# EAGLE board CorrectedBRD (EAGLE 7.6.0)
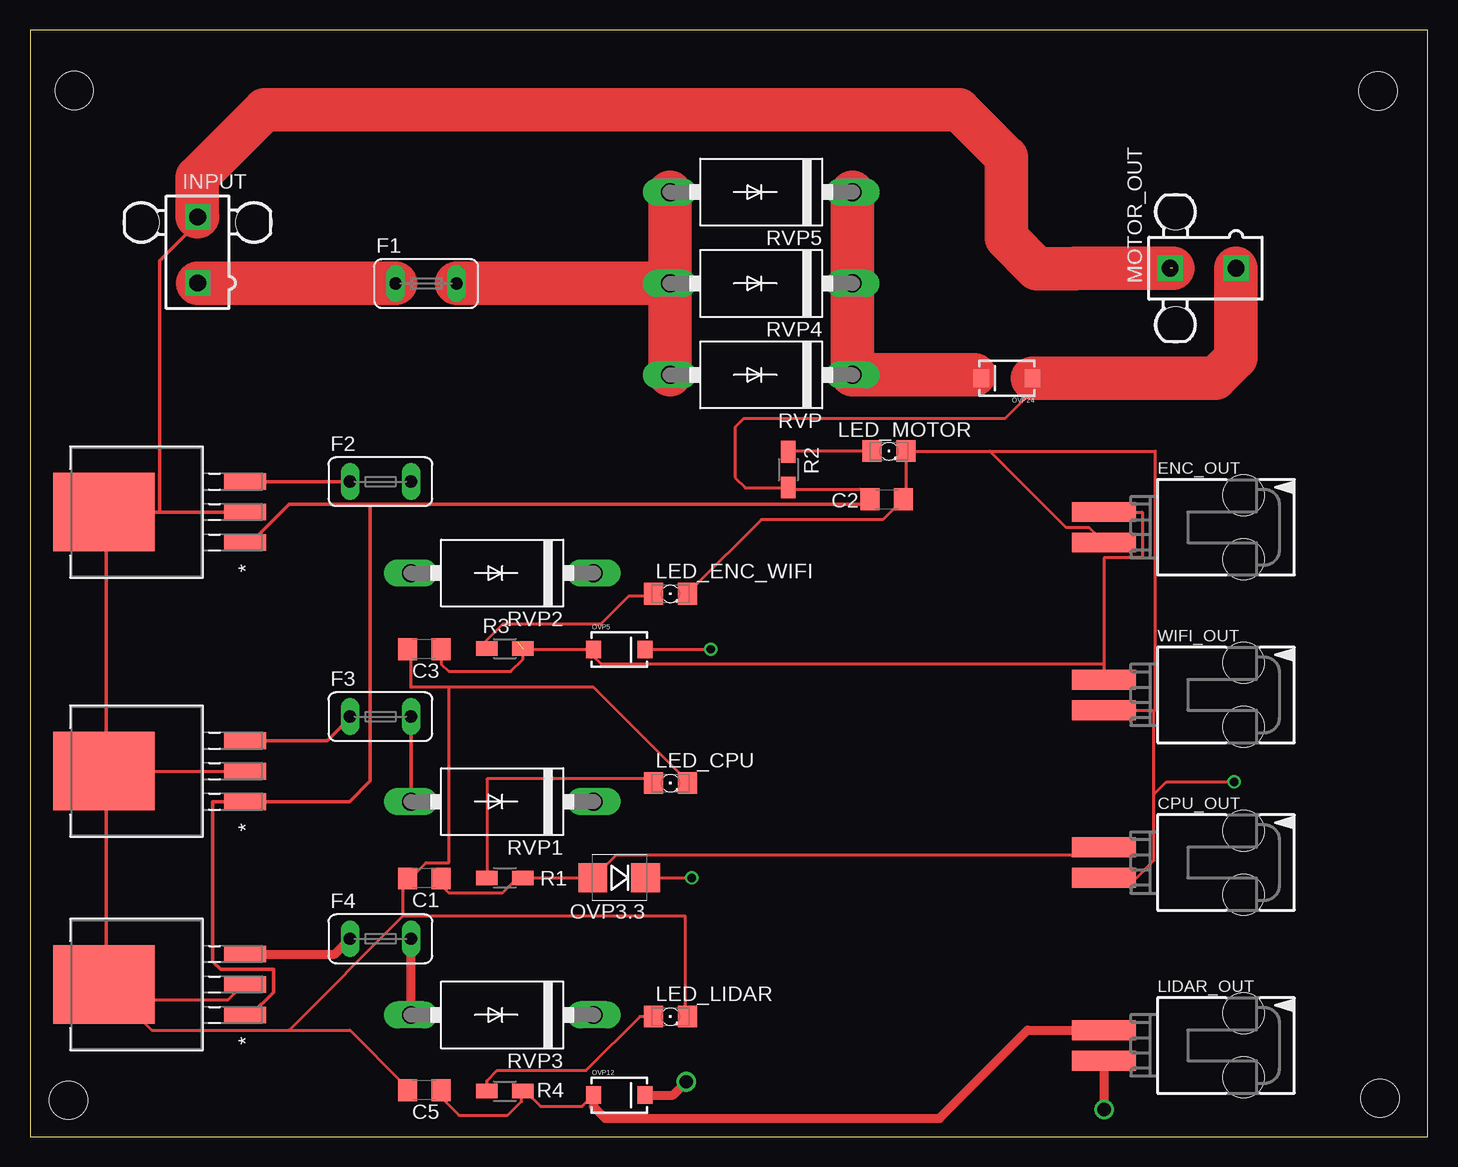
[diagram p0: board, top side]
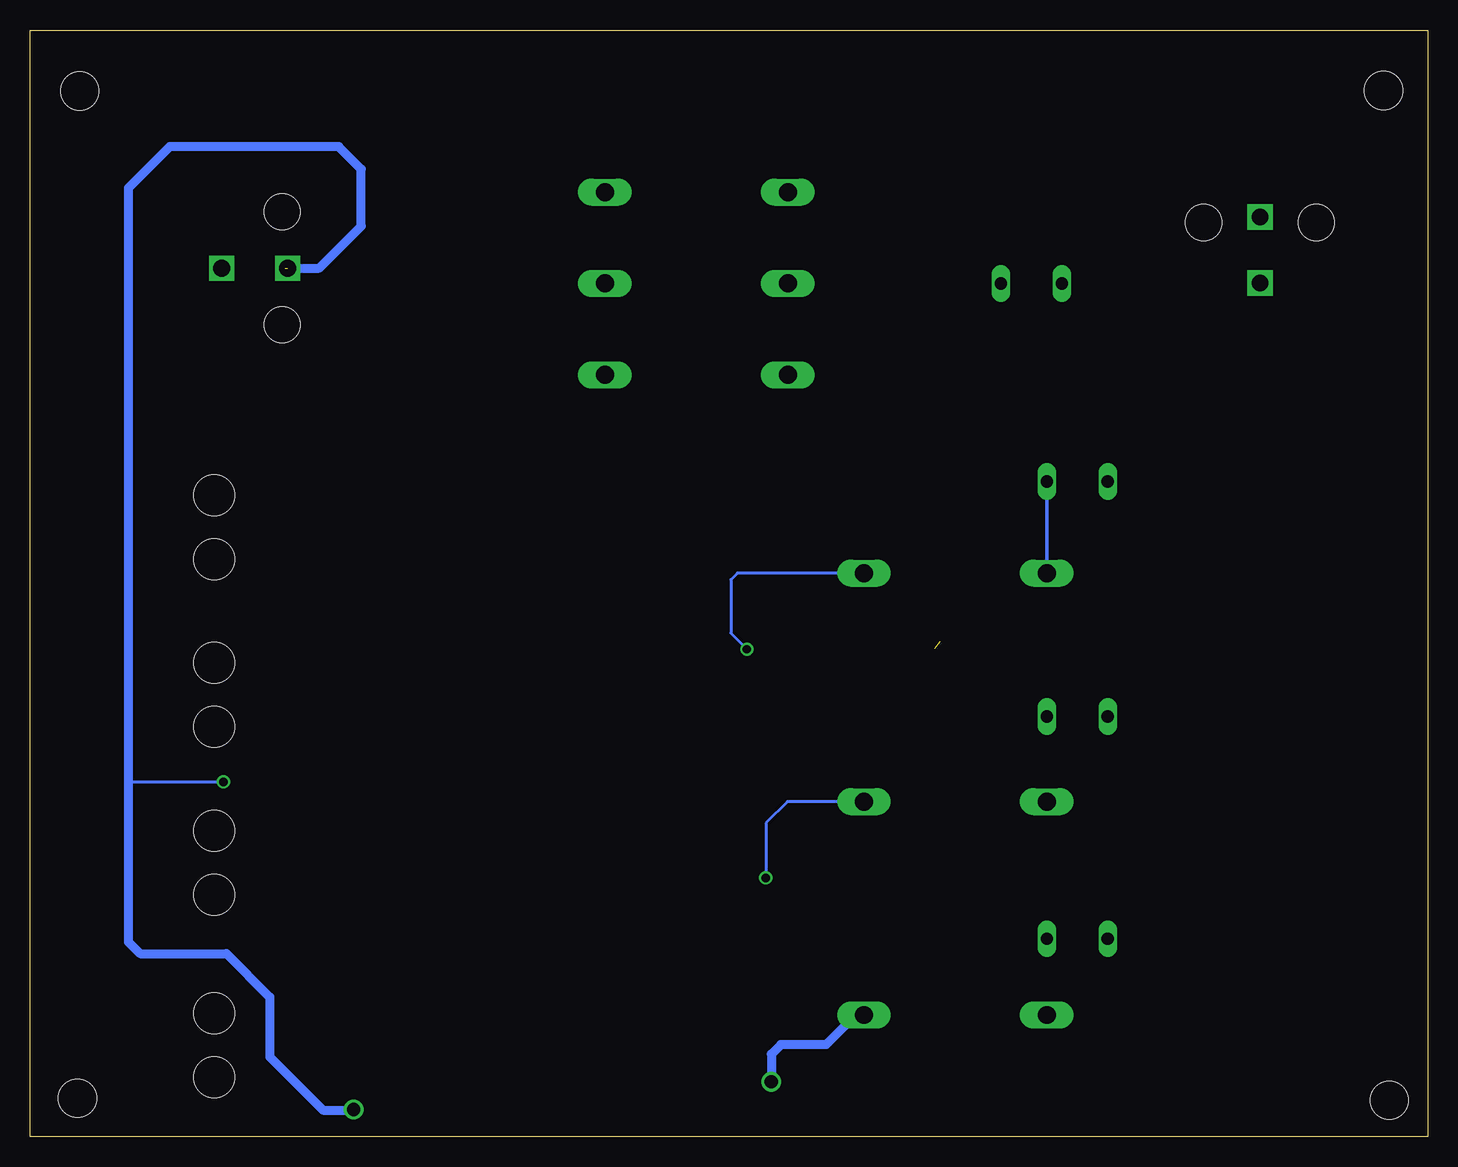
[diagram p1: board, bottom side, seen from below]

Size 116.51 x 92.24 mm. Coordinates in mm from the lower left corner, seen from the top.
Outline: 0,0 116.51,0 116.51,92.24 0,92.24 0,0
Copper layers (1*16): Top 0.035mm / dielectric 1.5mm / Bottom 0.035mm
Design rules "default": minimum track width 10mil, minimum drill 24mil, track to track 8mil, track to pad 8mil, pad to pad 8mil, via to via 8mil, smd to smd 8mil, copper to edge 40mil, drill to drill 8mil, minimum pad ring 10mil, minimum via ring 8mil, stop-mask expansion 4mil, vias tented up to drill 0mil, thermal gap 10mil
Holes 3.17 mm at 3.68,87.2 112.55,3.23 112.37,87.15 3.2,3.05

## Footprints (pad centres in the part's own frame; a part is rotated, then mirrored left to right if it is on the bottom)
C1206 = smd 1.6 x 1.8: 1 -1.4,0; 2 1.4,0
15-91-02 = smd 1.651 x 5.334: 1 -1.27,-10.795; 2 1.27,-10.795 | hole 3.404: -2.667,0.838; 2.667,0.838
TE5 = drill 1.016 long: 1 -2.54,0; 2 2.54,0
5566-2 = drill 1.4 square: 1 0,-2.75; 2 0,2.75 | hole 3: 4.7,2.29; -4.7,2.29
1206 = smd 1.6 x 1.803: A -1.422,0; C 1.422,0
SMB-DIODE = smd 2.4 x 2.4: A 2.2,0; C -2.2,0
SMA-DIODE = smd 1.27 x 1.47: A -2.15,0; C 2.15,0
R1206W = smd 1.8 x 1.2: 1 -1.499,0; 2 1.499,0
DO201-15 = drill 1.499 long: A 7.62,0; C -7.62,0
TO-263-3 = smd 1.397 x 3.505: 1 -2.54,-9.055; 2 0,-9.055; 3 2.54,-9.055 | smd 6.553 x 8.458: 4 0,2.743

## Placement (x,y rotation side)
C1  0.1UF  [C1206]  32.87,21.54 180 top
C2  0.1UF  [C1206]  71.42,53.14 0 top
C3  0.1UF  [C1206]  32.87,40.64 180 top
C5  0.1UF  [C1206]  32.87,3.89 180 top
CPU_OUT  C-GRID-02-15-19  [15-91-02]  100.33,22.86 270 top
ENC_OUT  C-GRID-02-15-19  [15-91-02]  100.33,50.8 270 top
F1  15A  [TE5]  33.02,71.12 0 top
F2  1A  [TE5]  29.21,54.61 0 top
F3  1A  [TE5]  29.21,35.03 0 top
F4  2A  [TE5]  29.21,16.51 0 top
INPUT  5566-2  [5566-2]  13.97,73.91 0 top
LED_CPU  RED  [1206]  53.39,29.49 0 top
LED_ENC_WIFI  RED  [1206]  53.39,45.26 0 top
LED_LIDAR  RED  [1206]  53.39,10.03 0 top
LED_MOTOR  RED  [1206]  71.6,57.15 0 top
LIDAR_OUT  C-GRID-02-15-19  [15-91-02]  100.33,7.62 270 top
MOTOR_OUT  5566-2  [5566-2]  97.79,72.39 90 top
OVP3.3  DIODE-ZENERSMB  [SMB-DIODE]  49.12,21.59 180 top
OVP5  TVSSMA  [SMA-DIODE]  49.12,40.61 0 top
OVP12  TVSSMA  [SMA-DIODE]  49.12,3.48 0 top
OVP24  TVSSMA  [SMA-DIODE]  81.43,63.22 180 top
R1  82OHM  [R1206W]  39.6,21.59 0 top
R2  1.1KOHM  [R1206W]  63.22,55.6 270 top
R3  180OHM  [R1206W]  39.6,40.69 0 top
R4  560OHM  [R1206W]  39.6,3.81 0 top
RVP  1N5400  [DO201-15]  60.96,63.5 180 top
RVP1  1N5400  [DO201-15]  39.37,27.94 180 top
RVP2  1N5400  [DO201-15]  39.37,46.99 180 top
RVP3  1N5400  [DO201-15]  39.37,10.16 180 top
RVP4  1N5400  [DO201-15]  60.96,71.12 180 top
RVP5  1N5400  [DO201-15]  60.96,78.74 180 top
U1  MIC29300-3.3WU  [TO-263-3]  8.89,30.48 90 top
U2  MIC29300-5.0WU  [TO-263-3]  8.89,52.07 90 top
U3  MIC29300-12WU  [TO-263-3]  8.89,12.7 90 top
WIFI_OUT  C-GRID-02-15-19  [15-91-02]  100.33,36.83 270 top

## Library data of the parts
C1-C3 C5 LED_CPU LED_ENC_WIFI LED_LIDAR LED_MOTOR = adafruit
CPU_OUT ENC_OUT LIDAR_OUT WIFI_OUT = con-molex; OC_FARNELL: unknown; OC_NEWARK: unknown
F1-F4 = fuse; OC_FARNELL: unknown; OC_NEWARK: unknown
INPUT MOTOR_OUT = con-molex; OC_FARNELL: 1822072; OC_NEWARK: unknown
OVP3.3 OVP5 OVP12 OVP24 = SparkFun-DiscreteSemi
R1-R4 = resistor
RVP RVP1-RVP5 = diode
U1 = MIC29300-5WU; COPYRIGHT: Copyright (C) 2015 Accelerated Designs. All rights reserved; MANUFACTURER_PART_NUMBER: mic29300-3.3wu; VENDOR: MICREL
U2 = MIC29300-5WU; COPYRIGHT: Copyright (C) 2015 Accelerated Designs. All rights reserved; MANUFACTURER_PART_NUMBER: mic29300-5.0wu; VENDOR: MICREL
U3 = MIC29300-5WU; COPYRIGHT: Copyright (C) 2015 Accelerated Designs. All rights reserved; MANUFACTURER_PART_NUMBER: mic29300-12wu; VENDOR: MICREL

## Nets
24V_P: C2.1 MOTOR_OUT.1 OVP24.A R2.2 U1.1 U2.1 U3.1
+3V3: C1.1 CPU_OUT.1 OVP3.3.A R1.2
+5V: C3.1 ENC_OUT.1 OVP5.A R3.2 WIFI_OUT.1
+12V: C5.1 LIDAR_OUT.1 OVP12.A R4.2
+24V: F1.1 INPUT.1
GND: C1.2 C2.2 C3.2 C5.2 CPU_OUT.2 ENC_OUT.2 INPUT.2 LED_CPU.C LED_ENC_WIFI.C LED_LIDAR.C LED_MOTOR.C LIDAR_OUT.2 MOTOR_OUT.2 U1.2 U1.4 U2.2 U2.4 U3.2 U3.4 WIFI_OUT.2
N$1: F1.2 RVP4.A RVP5.A RVP.A
N$2: OVP24.C RVP4.C RVP5.C RVP.C
N$3: F3.1 U1.3
N$4: F2.1 U2.3
N$5: F4.1 U3.3
N$6: F3.2 RVP1.A
N$7: F2.2 RVP2.A
N$8: F4.2 RVP3.A
N$9: OVP3.3.C RVP1.C
N$10: OVP5.C RVP2.C
N$11: OVP12.C RVP3.C
N$12: LED_CPU.A R1.1
N$14: LED_MOTOR.A R2.1
N$15: LED_ENC_WIFI.A R3.1
N$16: LED_LIDAR.A R4.1

## Tracks (layer width: path | path; a pad name or v marks a point on that pad's centre or on a via)
24V_P
  Top 0.254: 18.41,10.16 U3.1 | 18.41,49.53 U2.1 | 69.85,52.7 C2.1 69.85,53.34 69.22,53.98 63.5,53.98 R2.2 63.2,54.08 59.64,54.08 58.78,54.94 58.78,59.16 59.49,59.87 81.28,59.87 83.19,61.77 83.19,62.87 OVP24.A | 28.37,52.68 28.35,52.7
  Top 0.305: 18.41,10.16 20.32,12.06 20.32,13.97 15.88,13.97 15.24,14.61 15.24,27.94 U1.1 26.64,27.94 28.37,29.67 28.37,52.68 | 18.41,49.53 21.59,52.7 28.35,52.7 69.85,52.7
  Top 3.607: OVP24.A 98.81,63.22 100.51,64.92 100.51,72.36 MOTOR_OUT.1
+3V3
  Top 0.254: C1.1 34.29,20.95 34.92,20.32 39.37,20.32 40.64,21.59 R1.2 OVP3.3.A 46.99,21.59 48.9,23.5 88.9,23.5 CPU_OUT.1
+5V  (1 unrouted)
  Top 0.254: C3.1 34.29,40.64 34.29,39.4 34.9,38.79 40.08,38.79 41.1,39.8 R3.2 41.27,40.64 46.35,40.64 OVP5.A 46.99,40.01 47.62,39.37 89.53,39.37 | 89.53,39.37 89.53,48.26 92.71,48.26 92.71,52.07 ENC_OUT.1 | 89.53,39.37 WIFI_OUT.1
+12V
  Top 0.254: R4.2 41.27,3.81 42.55,2.54 46.03,2.54 OVP12.A | 40.64,3.81 R4.2 | C5.1 34.27,3.3 35.76,1.8 39.8,1.8 41,2.97 41,3.71 R4.2
  Top 0.762: OVP12.A 46.97,2.53 47.95,1.55 75.82,1.55 83.16,8.89 LIDAR_OUT.1
+24V
  Top 0.254: 13.97,71.12 INPUT.1
  Top 3.607: 13.97,71.12 F1.1
GND  (via drill 0.7, 1.1)  (1 unrouted)
  Top 0.254: LED_MOTOR.C 73.03,53.34 C2.2 72.39,52.7 71.12,51.44 60.96,51.44 55.24,45.72 LED_ENC_WIFI.C | LED_MOTOR.C 80.01,57.15 | 80.01,57.15 93.83,57.15 93.83,35.56 | LED_MOTOR.C | ENC_OUT.2 88.27,50.8 86.36,50.8 80.01,57.15 | 13.97,76.2 INPUT.2 | 34.92,37.47 46.99,37.47 54.61,29.84 LED_CPU.C | 34.92,37.47 31.75,37.47 31.75,40.64 C3.2 | U1.2 6.35,30.48 U1.4 | 21.59,8.89 10.16,8.89 7.62,11.43 | 21.59,8.89 26.67,8.89 31.11,4.45 C5.2 | 7.62,11.43 6.35,12.7 U3.4 7.62,11.43 | 31.11,18.41 31.11,20.95 C1.2 31.75,21.59 33.02,22.86 34.92,22.86 34.92,37.47 | 21.59,8.89 31.11,18.41 | 31.11,18.41 54.61,18.41 54.61,10.16 LED_LIDAR.C | 7.62,11.43 16.51,11.43 17.78,12.7 U3.2 | 6.35,52.07 U2.4 | WIFI_OUT.2 93.83,35.56 | CPU_OUT.2 92.25,21.59 93.7,23.04 93.7,28.55 | 93.7,28.55 93.7,35.43 93.83,35.56 | 93.7,28.55 94.74,29.59 v100.38,29.59
  Top 0.305: 10.79,52.07 6.35,52.07 6.35,30.48 6.35,12.7 | 10.79,52.07 U2.2 | 13.97,76.2 10.79,73.03 10.79,52.07
  Top 0.762: LIDAR_OUT.2 v89.53,2.29
  Top 3.607: 95.25,72.39 87.12,72.39 87.1,72.36 83.95,72.36 81.38,74.93 81.38,81.64 77.42,85.6 19.56,85.6 13.95,79.98 13.95,76.69 INPUT.2
  Bottom 0.254: 108.31,29.59 v100.38,29.59
  Bottom 0.762: MOTOR_OUT.2 92.41,72.39 88.9,75.89 88.9,80.64 90.78,82.53 104.85,82.53 108.31,79.07 108.31,29.59 108.31,16.26 107.31,15.27 100.13,15.27 96.52,11.66 96.52,6.68 92.08,2.23 89.59,2.23 v89.53,2.29
N$1
  Top 3.607: RVP4.A F1.2 | RVP4.A RVP.A | RVP4.A RVP5.A
N$2
  Top 0.254: 78.74,63.5 OVP24.C
  Top 3.607: RVP5.C RVP4.C RVP.C 78.74,63.5
N$3
  Top 0.305: U1.3 24.77,33.02 26.67,34.92 F3.1
N$4
  Top 0.305: U2.3 F2.1
N$5
  Top 0.762: F4.1 25.4,15.24 U3.3
N$6
  Top 0.305: RVP1.A F3.2
N$7
  Bottom 0.305: RVP2.A F2.2
N$8
  Top 0.762: RVP3.A F4.2
N$9  (via drill 0.7)
  Top 0.254: 50.8,21.59 OVP3.3.C v55.17,21.59
  Bottom 0.254: RVP1.C 53.37,27.94 55.14,26.16 55.14,21.61 v55.17,21.59
N$10  (via drill 0.7)
  Top 0.254: OVP5.C 51.44,40.64 v56.74,40.64
  Bottom 0.254: RVP2.C 57.53,46.99 58.09,46.43 58.09,41.99 v56.74,40.64
N$11  (via drill 1.1)
  Top 0.762: OVP12.C 53.59,3.48 v54.71,4.6
  Bottom 0.762: RVP3.C 47.68,10.16 50.14,7.7 53.92,7.7 54.71,6.91 v54.71,4.6
N$12
  Top 0.254: R1.1 38.1,29.84 51.44,29.84 LED_CPU.A | R1.1
N$14
  Top 0.254: LED_MOTOR.A 63.5,57.15 R2.1
N$15
  Top 0.254: R3.1 37.47,40.64 37.47,40.79 39.42,42.75 47.6,42.75 49.94,45.09 51.79,45.09 LED_ENC_WIFI.A 51.44,45.09
N$16
  Top 0.254: R4.1 38.1,4.7 38.94,5.54 46.35,5.54 50.85,10.03 LED_LIDAR.A